# Altium PCB S52多功能板.PcbDoc (part 1 of 5)
Units mm, origin at the board's own origin, x right, y up, seen from the top; angles counter-clockwise.
Board outline 152.4 x 101.6 mm, 2 copper layers (Top Layer, Bottom Layer); 136 components, 143 nets, 561 pads, 46 vias.
Unrouted connection lines stored in the file: 1.
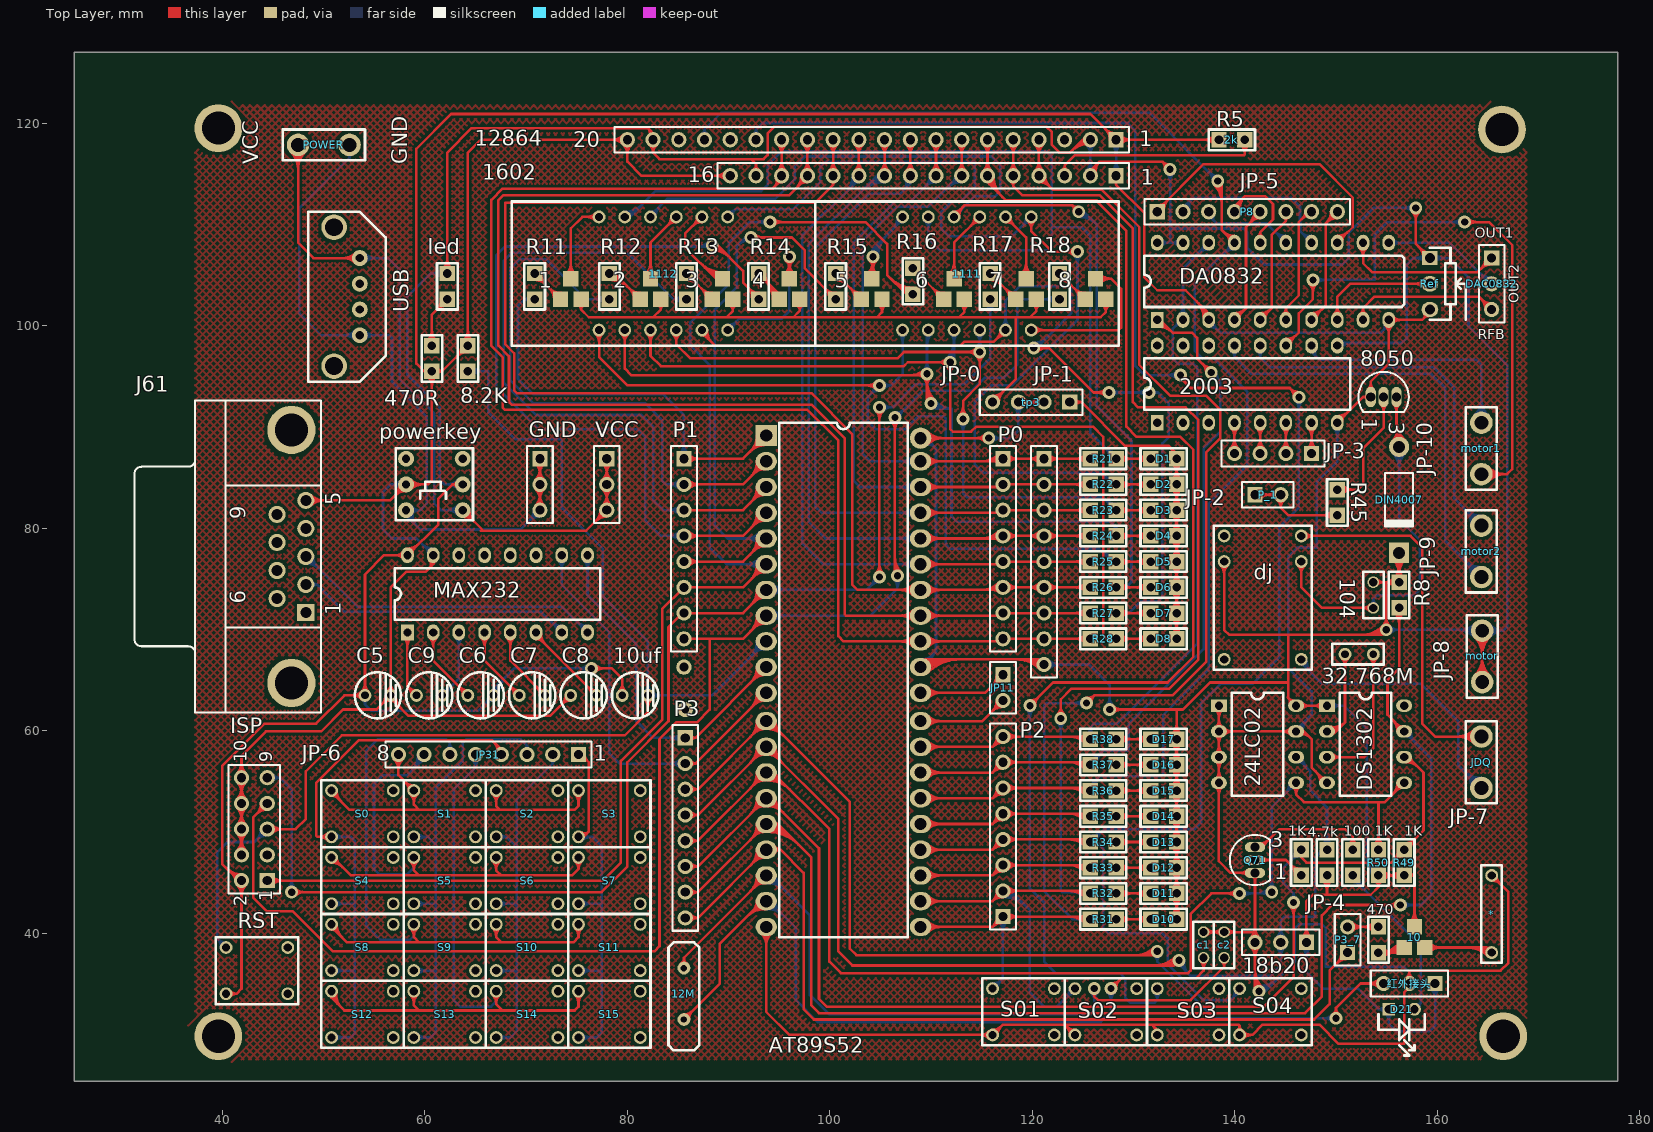
[diagram p0: Top Layer view]
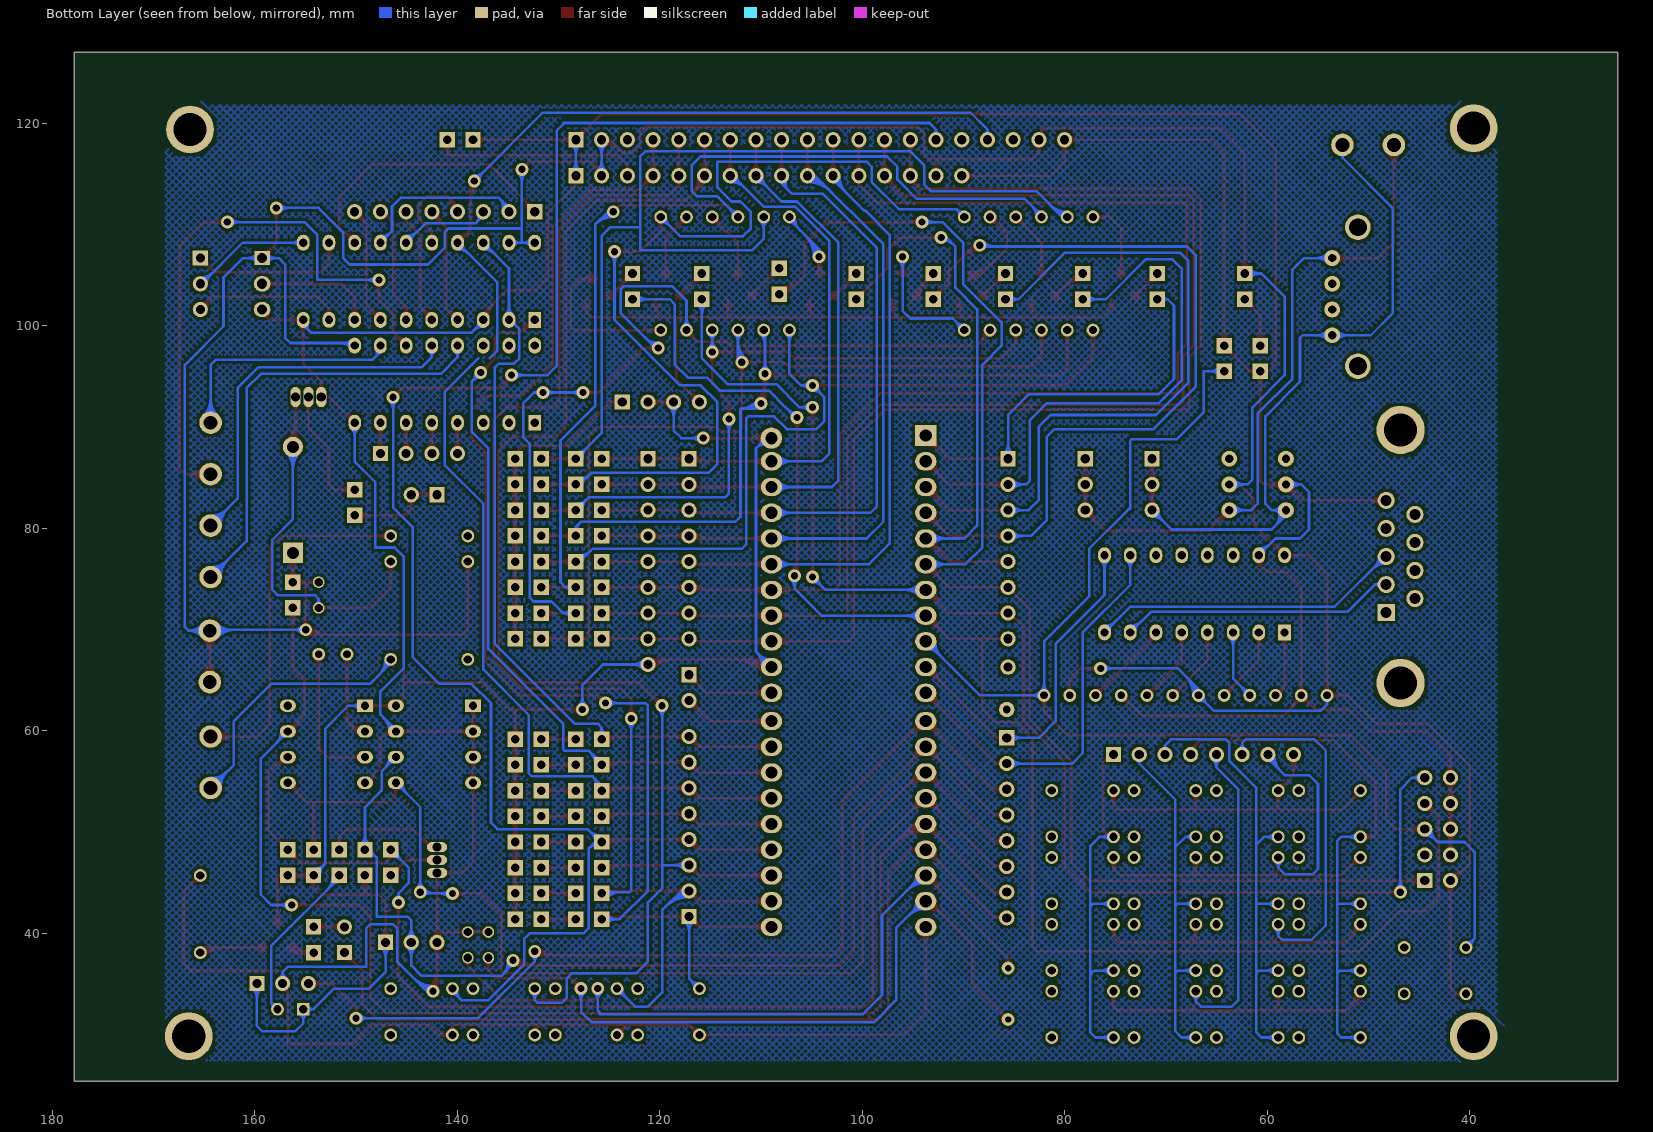
[diagram p1: Bottom Layer view, seen from below]

## Layer stack, top to bottom
Top Layer: signal copper 0.0356
Dielectric: dielectric 0.32, FR-4, Dk 4.8
Bottom Layer: signal copper 0.0356

## Board outline
25.4,25.4 177.8,25.4 177.8,127 25.4,127

## Design rules (kind name [scope] priority, off if disabled: settings)
Clearance [All] p1: gap=0.254
ComponentClearance [All] p1: gap=0.254 collisioncheckmode=0 verticalgap=0.254
PolygonConnect [All] p1: connectstyle=Relief reliefconductorwidth=0.254 reliefentries=4 polygonreliefangle="90 Angle"
RoutingVias [All] p1: holewidth=0.711 width=1.27 viastyle="Through Hole" minholewidth=0.711 minwidth=1.27 maxholewidth=0.711 maxwidth=1.27
SolderMaskExpansion [All] p1: expansion=0.102
TestPointUsage [All] p1: valid=0 allowmultiple=FALSE
Testpoint [All] p1: side=15 testpointundercomponent=TRUE minsize=1.016 maxsize=2.54 preferedsize=1.524 minholesize=0 maxholesize=1.016 preferedholesize=0.813 testpointgrid=0.025 style=1023 order=0-112345678
Width [All] p1: maxlimit=0.254 minlimit=0.254 preferedwidth=0.254
17 further rules are at their usual default settings.

## Components (designator, comment, footprint, x,y, rotation, side; value= is the part's Value field where it differs from the comment)
1 "NPN1" NPN1PF 72.39,105.664 r0 top
1K "RES34" RES1PF 146.558,48.26 r270 top
2 "2" NPN1PF 80.264,105.664 r0 top
2k "R5" RES1PF 138.43,118.364 r0 top
3 "3" NPN1PF 87.376,105.664 r0 top
4 "NPN1" NPN1PF 93.98,105.664 r0 top
4.7k "RES1" RES1PF 149.098,45.72 r90 top
5 "NPN1" NPN1PF 102.108,105.664 r0 top
6 "NPN1" NPN1PF 110.236,105.664 r0 top
7 "NPN1" NPN1PF 117.348,105.664 r0 top
8 "NPN1" NPN1PF 124.206,105.664 r0 top
8.2K "RES1" RES1PF 64.262,95.504 r90 top
10 "NPN1" NPN1PF 155.702,41.656 r0 top
10uf "10uf" cap2 74.93,63.5 r0 top
12M "12M" CRYSTAL 84.582,34.036 r90 top
18b20 "CON3" HDR1X3 147.066,39.116 r180 top
24LC02 "24LC02" DIP8 138.43,62.484 r0 top
32.768M "CY" CYPF 155.702,65.024 r180 top (schematic designator 121)
100 "RES2" RES1PF 151.638,45.72 r90 top
104 "0.01UF" RAD0.3 153.67,75.184 r270 top
470 "R2" RES1PF 154.178,38.1 r90 top
470R "R1" RES1PF 60.706,98.044 r270 top
1111 "LED8" LED8PF 98.552,112.268 r0 top
1112 "LED8" LED8PF 68.58,112.268 r0 top
1602 "Header 16" HDR1X16 128.27,114.808 r180 top (schematic designator JP6)
2003 "2003" 2003PF 130.81,91.44 r90 top
8050 "2N3904" TO-92A 154.686,92.964 r270 top (schematic designator Q7)
12864 "" HDR1X20 128.27,118.364 r180 top (schematic designator JP7)
* "LS1" LS1PF 165.354,38.1 r90 top
AT89S52 "AT89S52" AT89S52PF 92.71,65.532 r0 top
c1 "C" RAD0.3 136.906,40.64 r270 top
c2 "15p" RAD0.3 138.938,40.64 r270 top
C5 "1uf" cap2 49.53,63.5 r0 top
C6 "1uf" cap2 59.69,63.5 r0 top
C7 "1uf" cap2 64.77,63.5 r0 top
C8 "1uf" cap2 69.85,63.5 r0 top
C9 "1uf" cap2 54.61,63.5 r0 top
D1 "LED" RES1PF 134.239,86.868 r180 top
D2 "LED" RES1PF 134.239,84.328 r180 top
D3 "LED" RES1PF 134.239,81.788 r180 top
D4 "LED" RES1PF 134.239,79.248 r180 top
D5 "LED" RES1PF 134.239,76.708 r180 top
D6 "LED" RES1PF 134.239,74.168 r180 top
D7 "LED" RES1PF 134.239,71.628 r180 top
D8 "LED" RES1PF 134.239,69.088 r180 top
D10 "LED" RES1PF 134.239,41.402 r180 top
D11 "LED" RES1PF 134.239,43.942 r180 top
D12 "LED" RES1PF 134.239,46.482 r180 top
D13 "LED" RES1PF 134.239,49.022 r180 top
D14 "LED" RES1PF 134.239,51.562 r180 top
D15 "LED" RES1PF 134.239,54.102 r180 top
D16 "LED" RES1PF 134.239,56.642 r180 top
D17 "LED" RES1PF 134.239,59.182 r180 top
D21 "LED" LED 157.226,32.004 r180 top
DA0832 "DA0832" DAC0832PF 130.81,101.6 r90 top
DAC0832 "CON3" HDR1X3 165.354,106.68 r270 top
DIN4007 "Diode 1N4007" DO-41 156.21,82.804 r270 top
dj "JDQ" JDQPF 138.938,79.248 r0 top
DS1302 "DS1302" DIP8 149.098,62.484 r0 top
GND "公共电源" HDR1X3 71.374,86.868 r270 top
ISP "download" HDR2X5 44.45,45.212 r90 top
J61 "D Connector 9" DSUB1.385-2H9 37.338,77.216 r90 top
JDQ "POWER" POWERPF 164.338,59.436 r270 top
JP11 "Header 2" HDR1X2 117.094,65.532 r270 top
JP31 "Header 8" HDR1X8 75.184,57.658 r180 top
JP-0 "Header 9" HDR1X9 121.158,86.868 r270 top (schematic designator JP0)
JP-3 "Header 4" HDR1X4 147.574,87.376 r180 top (schematic designator JP4)
led "LED" RES1PF 62.23,105.156 r270 top (schematic designator D9)
MAX232 "MAX232" DIP16 58.293,69.723 r90 top
motor "POWER" POWERPF 164.416,64.81 r90 top
motor1 "POWER" POWERPF 164.338,85.344 r90 top
motor2 "POWER" POWERPF 164.338,75.184 r90 top (schematic designator motor3)
P0 "Header 8" HDR1X8 117.094,86.868 r270 top
P1 "Header 8" HDR1X8 85.598,86.868 r270 top locked
P2 "Header 8" HDR1X8 117.094,41.656 r90 top
P3 "Header 8" HDR1X8 85.725,59.309 r270 top
P3_7 "Header 2" HDR1X2 151.13,38.1 r90 top (schematic designator P_0)
P8 "Header 8" HDR1X8 132.334,111.252 r0 top
P_1 "Header 2" HDR1X2 141.986,83.312 r0 top
POWER "POWER" POWERPF 47.498,117.856 r0 top
powerkey "POWERKEY" POWERKEY1 63.754,81.788 r180 top
Q71 "2N3904" TO-92A 141.986,47.244 r0 top
R8 "1K" RES1PF 156.21,72.136 r90 top
R11 "RES1" RES1PF 70.866,102.616 r90 top
R12 "RES1" RES1PF 78.232,102.616 r90 top
R13 "RES1" RES1PF 85.852,102.616 r90 top
R14 "RES1" RES1PF 92.964,102.616 r90 top
R15 "RES1" RES1PF 100.584,102.616 r90 top
R16 "RES1" RES1PF 108.204,103.124 r90 top
R17 "RES1" RES1PF 115.824,102.616 r90 top
R18 "RES1" RES1PF 122.682,102.616 r90 top
R21 "RES1" RES1PF 125.73,86.868 r0 top
R22 "RES1" RES1PF 125.73,84.328 r0 top
R23 "RES1" RES1PF 125.73,81.788 r0 top
R24 "RES1" RES1PF 125.73,79.248 r0 top
R25 "RES1" RES1PF 125.73,76.708 r0 top
R26 "RES1" RES1PF 125.73,74.168 r0 top
R27 "RES1" RES1PF 125.73,71.628 r0 top
R28 "RES1" RES1PF 125.73,69.088 r0 top
R31 "RES1" RES1PF 125.73,41.402 r0 top
R32 "RES1" RES1PF 125.73,43.942 r0 top
R33 "RES1" RES1PF 125.73,46.482 r0 top
R34 "RES1" RES1PF 125.73,49.022 r0 top
R35 "RES1" RES1PF 125.73,51.562 r0 top
R36 "RES1" RES1PF 125.73,54.102 r0 top
R37 "RES1" RES1PF 125.73,56.642 r0 top
R38 "RES1" RES1PF 125.73,59.182 r0 top
R45 "1K" RES1PF 150.114,83.82 r270 top
R49 "1K" RES1PF 156.718,48.26 r270 top
R50 "1K" RES1PF 154.178,48.26 r270 top
Ref "25k" SIP3-D 159.258,106.68 r270 top
RST "KEY" keypf 40.386,38.608 r0 top (schematic designator reset)
S0 "KEY" KEYPF 50.8,54.102 r0 top
S1 "KEY" KEYPF 58.928,54.102 r0 top
S01 "KEY" KEYPF 116.078,34.544 r0 top
S02 "KEY" KEYPF 124.206,34.544 r0 top
S2 "KEY" KEYPF 67.056,54.102 r0 top
S3 "KEY" KEYPF 75.184,54.102 r0 top
S03 "KEY" KEYPF 132.334,34.544 r0 top
S4 "KEY" KEYPF 50.8,47.498 r0 top
S04 "KEY" KEYPF 140.462,34.544 r0 top
S5 "KEY" KEYPF 58.928,47.498 r0 top
S6 "KEY" KEYPF 67.056,47.498 r0 top
S7 "KEY" KEYPF 75.184,47.498 r0 top
S8 "KEY" KEYPF 50.8,40.894 r0 top
S9 "KEY" KEYPF 58.928,40.894 r0 top
S10 "KEY" KEYPF 67.056,40.894 r0 top
S11 "KEY" KEYPF 75.184,40.894 r0 top
S12 "KEY" KEYPF 50.8,34.29 r0 top
S13 "KEY" KEYPF 58.928,34.29 r0 top
S14 "KEY" KEYPF 67.056,34.29 r0 top
S15 "KEY" KEYPF 75.184,34.29 r0 top
tp3 "Header 4" HDR1X4 123.698,92.456 r180 top
USB "USBPOWER" USBPOWER1 53.594,99.06 r90 top (schematic designator 211)
VCC "" HDR1X3 77.978,86.868 r270 top
红外接头 "Header 3" HDR1X3 159.766,35.052 r180 top

## Footprints (in the part's own frame and the unit in brackets; to place one, negate y for a bottom-side part, rotate by r counter-clockwise, add the part's x,y. Pads: shape width x height; smd on the part's side, far side on the other; paste and mask are expansions set on the pad)
2003PF [mm] "2003"
  rect 1.575x1.25 hole 0.813: 1(-1.02,-1.525)
  oval 1.575x1.25 hole 0.813: 2(-1.02,-4.065) 3(-1.02,-6.605) 4(-1.02,-9.145) 5(-1.02,-11.685) 6(-1.02,-14.225) 7(-1.02,-16.765) 8(-1.02,-19.305) 9(6.6,-19.305) 10(6.6,-16.765) 11(6.6,-14.225) 12(6.6,-11.685) 13(6.6,-9.145) 14(6.6,-6.605) 15(6.6,-4.065) 16(6.6,-1.525)
  silkscreen extent 0.25,-20.58 5.33,-0.25
AT89S52PF [mil]
  rect 82.87x82.87 hole 47.75: 1(39.85,929.96)
  oval 82.87x71.06 hole 47.75: 2(39.85,829.96) 3(39.85,729.96) 4(39.85,629.96) 5(39.85,529.96) 6(39.85,429.96) 7(39.85,329.96) 8(39.85,229.96) 9(39.85,129.96) 10(39.85,29.96) 11(39.85,-70.04) 12(40,-180) 13(40,-280) 14(40,-380) 15(40,-480) 16(40,-580) 17(40,-680) 18(40,-780) 19(40,-880) 20(40,-980) 21(640,-980) 22(640,-880) 23(640,-780) 24(640,-680) 25(640,-580) 26(640,-480) 27(640,-380) 28(640,-280) 29(640,-180) 30(639.85,-70.04) 31(639.85,29.96) 32(639.85,129.96) 33(639.85,229.96) 34(639.85,329.96) 35(639.85,429.96) 36(639.85,529.96) 37(639.85,629.96) 38(639.85,729.96) 39(639.85,829.96)
  round 82.87 hole 47.75: 40(640,920)
  silkscreen extent 90,-1020 590,980
cap2 [mil]
  round 50 hole 30: 1(180,0) 2(280,0)
  silkscreen extent 140,-90 320,90
CRYSTAL [mil]
  round 50 hole 25: 1(-100,-40) 2(100,-40)
  silkscreen extent -220,-100 200,20
CYPF [mil] "CY"
  round 50 hole 30: 1(80,-100) 2(190,-100)
  silkscreen extent 40,-140 240,-60
DAC0832PF [mil] "DAC0832"
  rect 62x49.21 hole 32: 1(-40.15,-60.04)
  oval 62x49.21 hole 32: 2(-40.15,-160.04) 3(-40.15,-260.04) 4(-40.15,-360.04) 5(-40.15,-460.04) 6(-40.15,-560.04) 7(-40.15,-660.04) 8(-40.15,-760.04) 9(-40,-860) 10(-40.15,-960.04) 11(259.85,-960.04) 12(259.85,-860.04) 13(259.85,-760.04) 14(259.85,-660.04) 15(259.85,-560.04) 16(259.85,-460.04) 17(259.85,-360.04) 18(259.85,-260.04) 19(259.85,-160.04) 20(259.85,-60.04)
  silkscreen extent 10,-1020 210,-10
DIP8 [mil]
  rect 62x48 hole 32: 1(-0.15,-0.04)
  oval 62x48 hole 32: 2(-0.15,-100.04) 3(-0.15,-200.04) 4(-0.15,-300.04) 5(299.85,-300.04) 6(299.85,-200.04) 7(299.85,-100.04) 8(299.85,-0.04)
  silkscreen extent 50,-350 250,50
DIP16 [mil]
  rect 62x49.21 hole 32: 1(-0.15,-0.04)
  oval 62x49.21 hole 32: 2(-0.15,-100.04) 3(-0.15,-200.04) 4(-0.15,-300.04) 5(-0.15,-400.04) 6(-0.15,-500.04) 7(-0.15,-600.04) 8(-0.15,-700.04) 9(299.85,-700.04) 10(299.85,-600.04) 11(299.85,-500.04) 12(299.85,-400.04) 13(299.85,-300.04) 14(299.85,-200.04) 15(299.85,-100.04) 16(299.85,-0.04)
  silkscreen extent 50,-750 250,50
DO-41 [mm] "Diode, Axial; Body 5.2 x 2.7 mm (LxDia. max), Lead Dia. 0.86 mm (max)"
  round 2 hole 1.2: 1(-5.23,0)
  rect 2x2 hole 1.2: 2(5.23,0)
  silkscreen extent -2.65,-1.4 2.74,1.4
DSUB1.385-2H9 [mm] "Connector; D Subminiature; 9 Position; Right Angle; Pitch 1.385 mm"
  rect 1.69x1.69 hole 1.09: 1(-5.54,-10.92)
  round 1.69 hole 1.09: 2(-2.77,-10.92) 3(0,-10.92) 4(2.77,-10.92) 5(5.54,-10.92) 6(-4.155,-8.08) 7(-1.385,-8.08) 8(1.385,-8.08) 9(4.155,-8.08)
  round 4.76 hole 3.26: 10(-12.495,-9.5) 11(12.495,-9.5)
  silkscreen extent -15.4,-12.4 15.4,6
HDR1X2 [mm] "Connector; Header; 2 Position"
  rect 1.5x1.5 hole 0.9: 1(0,0)
  round 1.5 hole 0.9: 2(2.54,0)
  silkscreen extent -1.27,-1.27 3.81,1.27
HDR1X3 [mm] "Connector; Header; 3 Position"
  rect 1.5x1.5 hole 0.9: 1(0,0)
  round 1.5 hole 0.9: 2(2.54,0) 3(5.08,0)
  silkscreen extent -1.27,-1.27 6.35,1.27
HDR1X4 [mm] "Connector; Header; 4 Position"
  rect 1.5x1.5 hole 0.9: 1(0,0)
  round 1.5 hole 0.9: 2(2.54,0) 3(5.08,0) 4(7.62,0)
  silkscreen extent -1.27,-1.27 8.89,1.27
HDR1X8 [mm] "Connector; Header; 8 Position"
  rect 1.5x1.5 hole 0.9: 1(0,0)
  round 1.5 hole 0.9: 2(2.54,0) 3(5.08,0) 4(7.62,0) 5(10.16,0) 6(12.7,0) 7(15.24,0) 8(17.78,0)
  silkscreen extent -1.27,-1.27 19.05,1.27
HDR1X9 [mm] "Connector; Header; 9 Position"
  rect 1.5x1.5 hole 0.9: 1(0,0)
  round 1.5 hole 0.9: 2(2.54,0) 3(5.08,0) 4(7.62,0) 5(10.16,0) 6(12.7,0) 7(15.24,0) 8(17.78,0) 9(20.32,0)
  silkscreen extent -1.27,-1.27 21.59,1.27
HDR1X16 [mm] "Connector; Header; 16 Position"
  rect 1.5x1.5 hole 0.9: 1(0,0)
  round 1.5 hole 0.9: 2(2.54,0) 3(5.08,0) 4(7.62,0) 5(10.16,0) 6(12.7,0) 7(15.24,0) 8(17.78,0) 9(20.32,0) 10(22.86,0) 11(25.4,0) 12(27.94,0) 13(30.48,0) 14(33.02,0) 15(35.56,0) 16(38.1,0)
  silkscreen extent -1.27,-1.27 39.37,1.27
HDR1X20 [mm] "Connector; Header; 20 Position"
  rect 1.5x1.5 hole 0.9: 1(0,0)
  round 1.5 hole 0.9: 2(2.54,0) 3(5.08,0) 4(7.62,0) 5(10.16,0) 6(12.7,0) 7(15.24,0) 8(17.78,0) 9(20.32,0) 10(22.86,0) 11(25.4,0) 12(27.94,0) 13(30.48,0) 14(33.02,0) 15(35.56,0) 16(38.1,0) 17(40.64,0) 18(43.18,0) 19(45.72,0) 20(48.26,0)
  silkscreen extent -1.27,-1.27 49.53,1.27
HDR2X5 [mm] "Connector; Header; 5x2 Position"
  rect 1.5x1.5 hole 0.9: 1(0,0)
  round 1.5 hole 0.9: 2(0,2.54) 3(2.54,0) 4(2.54,2.54) 5(5.08,0) 6(5.08,2.54) 7(7.62,0) 8(7.62,2.54) 9(10.16,0) 10(10.16,2.54)
  silkscreen extent -1.27,-1.27 11.43,3.81
JDQPF [mil] "JDQ"
  round 50 hole 32: 1(0,0) 2(300,0) 3(0,-480) 4(300,-480) 5(0,-100) 6(300,-100)
  silkscreen extent -40,-520 340,40
keypf [mil] "KEY"
  round 50 hole 32: 1(0,0) 2(0,-180) ""(240,-180) ""(240,0)
  silkscreen extent -40,-220 280,40
KEYPF [mil] "KEY"
  round 50 hole 32: 1(0,0) 2(0,-180) ""(240,-180) ""(240,0)
  silkscreen extent -40,-220 280,40
LED [mil]
  rect 50x50 hole 32: 1(80,-20)
  round 50 hole 32: 2(-20,-20)
  silkscreen extent -60,0 120,160
LED8PF [mil] "LED8"
  round 50 hole 32: 1(340,-500) 2(440,-500) 3(540,-500) 4(640,-500) 5(740,-500) 6(840,-500) 7(840,-60) 8(740,-60) 9(640,-60) 10(540,-60) 11(440,-60) 12(340,-60)
  silkscreen extent 0,-560 1180,0
LS1PF [mil] "LS1"
  round 50 hole 32: 1(0,0) 2(300,0)
  silkscreen extent -40,-40 340,40
NPN1PF [mil] "NPN1"
  rect 60x60 smd: B(40,-120) C(80,-40) E(120,-120)
POWERKEY1 [mil] "POWERKEY"
  round 62 hole 32: 1(0,0) 2(0,-100) 3(0,-200) 4(220,-200) 5(220,-100) 6(220,0)
  silkscreen extent -40,-240 260,40
POWERPF [mm] "POWER"
  round 2.224 hole 1.362: 1(0,0) 2(5.08,0)
  silkscreen extent -1.52,-1.52 6.6,1.52
RAD0.3 [mil]
  round 45 hole 32: 1(20,0) 2(120,0)
  silkscreen extent -20,-40 160,40
RES1PF [mil] "RES1"
  rect 60x60 hole 33.19: 1(0,0) 2(100,0)
  silkscreen extent -40,-40 140,40
SIP3-D [mil]
  rect 55x60 hole 40: 1(0,0)
  oval 60x65 hole 40: 2(200,0) 3(100,0)
  silkscreen extent -40,0 240,140
TO-92A [mm] "TO, Flat Index; 3 In-Line, Axial Leads; Body Dia. 4.5mm; Leads 0.51 x 0.48 mm (max)"
  oval 2x1 hole 0.9: 1(0,-1.27) 2(0,0) 3(0,1.27)
  silkscreen extent -2.48,-2.48 1.5,2.48
USBPOWER1 [mil] "USBPOWER"
  round 62 hole 32: 1(0,0) 2(100,0) 3(200,0) 4(300,0)
  round 99.37 hole 69.37: ""(-120,100) ""(420,100)
  silkscreen extent -180,-100 480,200

## Part data
1K 2k 100 470 470R R8 R45 R49 R50: library part RES1
2 3: library part NPN1
10uf C5 C6 C7 C8 C9: library part "CAPACITOR POL", "Capacitor"
12M: library part CRYSTAL, "Crystal"
18b20 GND VCC: library part "Header 3", "Header, 3-Pin"
104 c1 c2: library part CAP, "Capacitor"
1602: "Header, 16-Pin"
8050 Q71: "NPN General Purpose Amplifier"
12864: library part "Header 20", "Header, 20-Pin"
AT89S52: library part 8051
DAC0832: "Connector"
DIN4007: "1 Amp General Purpose Rectifier"
ISP: library part "Header 5X2", "Header, 5-Pin, Dual row"
J61: "Receptacle Assembly, 9 Position, Right Angle"
JP11 P3_7 P_1: "Header, 2-Pin"
JP31 P0 P1 P2 P3 P8: "Header, 8-Pin"
JP-0: "Header, 9-Pin"
JP-3 tp3: "Header, 4-Pin"
Ref: library part POT2, "Potentiometer"
红外接头: "Header, 3-Pin"

## Free pads (board coordinates)
  round 1.524 hole 0.9: 0(85.598,66.294)
  round 1.524 hole 0.762: 1(85.725,62.103)
  round 4.72 hole 3.267: 2(39.624,29.845) 2(39.624,119.507) 2(166.37,119.38) 2(166.497,29.845)

## Via types
v1: diameter 1.27, hole 0.711, Top Layer to Bottom Layer, 46 vias

## Nets (pads, with @x,y where several pads share a name; then routed paths per layer and width w, separated by ;. In a path a pad name is that pad's centre, name@x,y a point inside that pad or via, vN(x,y) a via of type N, cw(c..) or ccw(c..) an arc to the next point about the centre after c; other vN are vias at no path point)
DISPLAY: 1.E 2.E 3.E 4.E 5.E 6.E 7.E 8.E tp3.4 | length 91.8
  Top Layer w0.254: 1.E@75.16,102.045 cw(c74.943,101.6) 75.438,101.6 ; 1.E@75.438,102.616 75.438,101.6 ; 1.E@75.716,102.045 ccw(c75.933,101.6) 75.438,101.6 ; 82.55,100.838 83.312,101.6 ; 2.E@83.034,102.045 cw(c82.817,101.6) 83.312,101.6 ; 2.E@83.312,102.616 83.312,101.6 ; 2.E@83.59,102.045 ccw(c83.807,101.6) 83.312,101.6 ; 89.789,100.838 90.424,101.473 ; 3.E@90.089,102.077 cw(c89.713,101.473) 90.424,101.473 ; 3.E@90.424,102.616 90.424,101.473 ; 3.E@90.759,102.077 ccw(c91.135,101.473) 90.424,101.473 ; 96.393,100.838 97.028,101.473 ; 4.E@96.693,102.077 cw(c96.317,101.473) 97.028,101.473 ; 4.E@97.028,102.616 97.028,101.473 ; 4.E@97.363,102.077 ccw(c97.739,101.473) 97.028,101.473 ; 104.648,100.838 105.156,101.346 ; 5.E@104.775,102.108 cw(c104.204,101.346) 105.156,101.346 ; 5.E@105.156,102.616 105.156,101.346 ; 5.E@105.537,102.108 ccw(c106.108,101.346) 105.156,101.346 ; 112.776,100.838 113.284,101.346 ; 6.E@112.903,102.108 cw(c112.332,101.346) 113.284,101.346 ; 6.E@113.284,102.616 113.284,101.346 ; 6.E@113.665,102.108 ccw(c114.236,101.346) 113.284,101.346 ; tp3.4@116.078,92.456 118.364,94.742 118.364,100.838 ; tp3.4@116.078,92.825 ccw(c116.078,93.716) 116.708,93.086 ccw(c117.338,92.456) tp3.4@116.447,92.456 ; tp3.4@116.078,93.079 ccw(c116.078,94.583) 117.142,93.52 ccw(c118.205,92.456) tp3.4@116.701,92.456 ; 119.761,100.838 120.396,101.473 ; 7.E@120.061,102.077 cw(c119.685,101.473) 120.396,101.473 ; 7.E@120.396,102.616 120.396,101.473 ; 7.E@120.731,102.077 ccw(c121.107,101.473) 120.396,101.473 ; 8.E@126.873,102.108 cw(c126.302,101.346) 127.254,101.346 ; 8.E@127.254,102.616 127.254,101.346 ; 8.E@127.635,102.108 ccw(c128.206,101.346) 127.254,101.346 ; 75.438,101.6 76.2,100.838 126.746,100.838 127.254,101.346
GND: 2k.1 8.2K.2 18b20.3 24LC02.1 24LC02.2 24LC02.3 24LC02.4 24LC02.7 470R.2 1602.1 1602.16 2003.8 8050.1 12864.1 12864.20 *.2 AT89S52.20 c1.1 c2.1 C5.2 C8.1 DA0832.3 DA0832.10 DS1302.4 ISP.4 ISP.6 ISP.8 ISP.10 J61.5 MAX232.15 powerkey.5 Q71.1 Ref.2 S01.2 S02.2 S03.2 S04.2 红外接头.2 | length 724.4
  Top Layer w0.254: ISP.4@41.469,48.193 ccw(c40.406,49.256) 41.91,49.256 ccw(c43.414,49.256) ISP.4@42.351,48.193 ; ISP.6@41.469,49.851 cw(c40.406,48.788) 41.91,48.788 cw(c43.414,48.788) ISP.6@42.351,49.851 ; ISP.6@41.469,50.733 ccw(c40.406,51.796) 41.91,51.796 ccw(c43.414,51.796) ISP.6@42.351,50.733 ; ISP.8@41.469,52.391 cw(c40.406,51.328) 41.91,51.328 cw(c43.414,51.328) ISP.8@42.351,52.391 ; ISP.8@41.469,53.273 ccw(c40.406,54.336) 41.91,54.336 ccw(c43.414,54.336) ISP.8@42.351,53.273 ; ISP.10@41.469,54.931 cw(c40.406,53.868) 41.91,53.868 cw(c43.414,53.868) ISP.10@42.351,54.931 ; ISP.10@41.469,55.813 ccw(c40.406,56.876) 41.91,56.876 ccw(c43.414,56.876) ISP.10@42.351,55.813 ; ISP.4@41.649,48.013 ccw(c41.019,48.643) 41.91,48.643 ccw(c42.801,48.643) ISP.4@42.171,48.013 ; ISP.6@41.649,50.031 cw(c41.019,49.401) 41.91,49.401 cw(c42.801,49.401) ISP.6@42.171,50.031 ; ISP.6@41.649,50.553 ccw(c41.019,51.183) 41.91,51.183 ccw(c42.801,51.183) ISP.6@42.171,50.553 ; ISP.8@41.649,52.571 cw(c41.019,51.941) 41.91,51.941 cw(c42.801,51.941) ISP.8@42.171,52.571 ; ISP.8@41.649,53.093 ccw(c41.019,53.723) 41.91,53.723 ccw(c42.801,53.723) ISP.8@42.171,53.093 ; ISP.10@41.649,55.111 cw(c41.019,54.481) 41.91,54.481 cw(c42.801,54.481) ISP.10@42.171,55.111 ; ISP.10@41.649,55.633 ccw(c41.019,56.263) 41.91,56.263 ccw(c42.801,56.263) ISP.10@42.171,55.633 ; ISP.4@41.91,47.752 41.91,57.531 44.323,59.944 49.784,59.944 51.943,62.103 55.245,62.103 C5.2@56.642,63.5 ; J61.5@48.258,82.756 56.594,82.756 powerkey.5@58.166,84.328 60.325,84.328 60.706,84.709 470R.2@60.706,95.504 ; J61.5@48.586,82.428 cw(c49.378,81.636) 49.378,82.756 cw(c49.378,83.876) J61.5@48.586,83.084 ; J61.5@48.766,82.248 cw(c49.991,81.023) 49.991,82.756 cw(c49.991,84.489) J61.5@48.766,83.264 ; C5.2@56.134,63.5 cw(c54.908,63.5) 55.775,62.633 cw(c56.642,61.766) 56.642,62.992 cw(c56.642,62.379) 57.076,62.812 ; C5.2@56.283,63.859 ccw(c55.416,64.726) 56.642,64.726 ccw(c57.868,64.726) C5.2@57.001,63.859 ; C5.2@56.896,63.5 ccw(c58.122,63.5) 57.255,62.633 ; C5.2@57.15,63.5 ccw(c58.99,63.5) 57.689,62.199 ; powerkey.5@57.506,84.328 cw(c55.911,84.328) 57.039,83.201 cw(c58.166,82.073) powerkey.5@58.166,83.668 ; powerkey.5@57.76,84.328 cw(c56.778,84.328) 57.472,83.634 cw(c58.166,82.94) powerkey.5@58.166,83.922 ; powerkey.5@58.453,84.041 cw(c59.147,83.347) 59.147,84.328 cw(c59.147,85.309) powerkey.5@58.453,84.615 ; powerkey.5@58.633,83.861 cw(c59.76,82.734) 59.76,84.328 cw(c59.76,85.922) powerkey.5@58.633,84.795 ; 470R.2@60.257,95.055 cw(c59.173,93.971) 60.706,93.971 cw(c62.239,93.971) 470R.2@61.155,95.055 ; 60.432,76.053 ccw(c60.019,76.466) MAX232.15@60.459,76.849 ; 470R.2@60.437,95.235 cw(c59.786,94.584) 60.706,94.584 cw(c61.626,94.584) 470R.2@60.975,95.235 ; 60.624,76.245 ccw(c60.225,76.645) MAX232.15@60.65,77.016 ; MAX232.15@60.657,76.711 cw(c60.56,76.455) 60.834,76.455 ; 60.816,76.437 ccw(c60.43,76.824) MAX232.15@60.842,77.183 ; MAX232.15@60.834,77.339 60.834,76.455 ; MAX232.15@61.011,76.711 ccw(c61.108,76.455) 60.834,76.455 ; 470R.2@61.277,95.226 cw(c61.722,95.009) 61.722,95.504 ; 470R.2@61.277,95.782 ccw(c61.722,95.999) 61.722,95.504 ; 8.2K.2@63.627,98.044 cw(c62.094,98.044) 63.178,96.96 cw(c64.262,95.876) 8.2K.2@64.262,97.409 ; 8.2K.2@63.813,98.493 ccw(c62.729,99.577) 64.262,99.577 ccw(c65.795,99.577) 8.2K.2@64.711,98.493 ; 8.2K.2@63.881,98.044 cw(c62.961,98.044) 63.612,97.394 cw(c64.262,96.743) 8.2K.2@64.262,97.663 ; 8.2K.2@63.993,98.313 ccw(c63.342,98.964) 64.262,98.964 ccw(c65.182,98.964) 8.2K.2@64.531,98.313 ; C8.1@73.914,63.5 cw(c72.688,63.5) 73.555,62.633 cw(c74.422,61.766) C8.1@74.422,62.992 ; C8.1@74.422,63.5 72.39,61.468 58.42,61.468 56.642,63.246 56.642,74.168 58.166,75.692 60.071,75.692 60.834,76.455 ; 12864.20@79.569,118.805 cw(c78.506,119.868) 78.506,118.364 cw(c78.506,116.86) 79.569,117.923 cw(c78.506,116.86) 80.01,116.86 cw(c81.514,116.86) 12864.20@80.451,117.923 ; 12864.20@79.749,118.625 cw(c79.119,119.255) 79.119,118.364 cw(c79.119,117.473) 79.749,118.103 cw(c79.119,117.473) 80.01,117.473 cw(c80.901,117.473) 12864.20@80.271,118.103 ; 1602.16@89.729,114.367 ccw(c88.666,113.304) 88.666,114.808 ccw(c88.666,116.312) 1602.16@89.729,115.249 ; 1602.16@89.909,114.547 ccw(c89.279,113.917) 89.279,114.808 ccw(c89.279,115.699) 1602.16@89.909,115.069 ; 1602.16@90.17,114.808 81.407,114.808 80.01,116.205 12864.20@80.01,118.364 65.532,118.364 64.262,117.094 8.2K.2@64.262,98.044 61.722,95.504 ; AT89S52.20@93.178,40.092 cw(c91.854,38.768) 93.726,38.768 cw(c95.598,38.768) AT89S52.20@94.274,40.092 ; AT89S52.20@93.357,40.271 cw(c92.467,39.381) 93.726,39.381 cw(c94.985,39.381) AT89S52.20@94.095,40.271 ; AT89S52.20@93.726,40.64 93.726,32.258 96.012,29.972 S01.2@116.078,29.972 117.094,30.988 140.335,30.988 140.462,30.861 ; S01.2@115.719,29.613 ccw(c114.852,28.746) 114.852,29.972 ccw(c114.852,31.198) S01.2@115.719,30.331 ; S01.2@116.078,30.48 ccw(c116.078,31.706) 116.945,30.839 ccw(c117.812,29.972) S01.2@116.586,29.972 ; 123.19,30.988 S02.2@124.206,29.972 ; S02.2@123.698,29.972 ccw(c122.472,29.972) 123.339,30.839 ccw(c124.206,31.706) S02.2@124.206,30.48 ; 12864.1@127.647,118.364 ccw(c126.143,118.364) 127.206,119.428 ccw(c128.27,120.491) 12864.1@128.27,118.987 ; 12864.1@127.901,118.364 ccw(c127.01,118.364) 127.64,118.994 ccw(c128.27,119.624) 12864.1@128.27,118.733 ; 1602.1@128.057,114.222 cw(c127.947,113.919) 128.27,113.919 ; 1602.1@128.27,114.808 128.27,113.919 ; 1602.1@128.483,114.222 ccw(c128.593,113.919) 128.27,113.919 ; 12864.1@128.531,118.103 cw(c129.161,117.473) 129.161,118.364 cw(c129.161,119.255) 12864.1@128.531,118.625 ; 12864.1@128.711,117.923 cw(c129.774,116.86) 129.774,118.364 cw(c129.774,119.868) 12864.1@128.711,118.805 ; 131.826,30.988 132.334,30.48 S03.2@132.334,29.972 ccw(c131.692,30.171) 132.167,30.647 ; 131.87,30.944 cw(c131.237,30.312) S03.2@132.091,30.047 ; 136.229,102.404 cw(c134.567,100.743) DA0832.3@136.917,100.743 ; 136.662,101.971 cw(c135.434,100.743) DA0832.3@137.171,100.743 ; c1.1@136.906,40.132 141.732,40.132 141.986,39.878 ; 137.096,101.537 cw(c136.301,100.743) DA0832.3@137.425,100.743 ; c1.1@137.22,39.818 cw(c137.979,39.059) 137.979,40.132 cw(c137.979,41.205) c1.1@137.22,40.446 ; DA0832.3@137.415,100.58 137.415,101.218 135.128,103.505 132.334,103.505 131.064,104.775 131.064,111.125 128.27,113.919 ; 2k.1@137.981,117.915 ccw(c136.897,116.831) 136.897,118.364 ccw(c136.897,119.897) 2k.1@137.981,118.813 ; 24LC02.4@138.085,54.522 cw(c137.261,53.698) 138.426,53.698 cw(c139.591,53.698) 24LC02.4@138.767,54.522 ; 24LC02.4@138.085,55.204 ccw(c137.261,56.028) 138.426,56.028 ccw(c139.591,56.028) 24LC02.4@138.767,55.204 ; 24LC02.3@138.085,57.062 cw(c137.261,56.238) 138.426,56.238 cw(c139.591,56.238) 24LC02.3@138.767,57.062 ; 24LC02.3@138.085,57.744 ccw(c137.261,58.568) 138.426,58.568 ccw(c139.591,58.568) 24LC02.3@138.767,57.744 ; 24LC02.2@138.085,59.602 cw(c137.261,58.778) 138.426,58.778 cw(c139.591,58.778) 24LC02.2@138.767,59.602 ; 24LC02.2@138.085,60.284 ccw(c137.261,61.108) 138.426,61.108 ccw(c139.591,61.108) 24LC02.2@138.767,60.284 ; 24LC02.1@138.085,62.142 cw(c137.261,61.318) 138.426,61.318 cw(c139.591,61.318) 24LC02.1@138.767,62.142 ; 2k.1@138.161,118.095 ccw(c137.51,117.444) 137.51,118.364 ccw(c137.51,119.284) 2k.1@138.161,118.633 ; 24LC02.2@138.426,59.943 146.813,59.943 147.574,59.182 147.574,56.383 DS1302.4@149.094,54.863 ; 24LC02.1@138.426,62.483 138.426,47.121 139.573,45.974 Q71.1@141.986,45.974 141.986,34.671 v1(142.367,34.29) cw(c143.287,35.21) 141.986,35.21 ; 2k.1@138.43,118.364 12864.1@128.27,118.364 125.73,120.904 62.611,120.904 59.182,117.475 59.182,96.266 59.944,95.504 61.722,95.504 ; c2.1@138.624,39.818 ccw(c137.865,39.059) 137.865,40.132 ccw(c137.865,41.205) c2.1@138.624,40.446 ; 24LC02.2@138.945,59.602 cw(c139.769,58.778) 139.769,59.943 cw(c139.769,61.108) 24LC02.2@138.945,60.284 ; c2.1@139.252,39.818 cw(c140.011,39.059) 140.011,40.132 cw(c140.011,41.205) c2.1@139.252,40.446 ; S04.2@140.204,30.41 ccw(c139.938,30.861) 140.462,30.861 ; S04.2@140.72,30.41 cw(c140.986,30.861) 140.462,30.861 ; S04.2@140.821,29.613 cw(c141.688,28.746) 141.688,29.972 cw(c141.688,31.198) S04.2@140.821,30.331 ; Q71.1@141.222,45.71 ccw(c140.585,45.074) 140.585,45.974 ccw(c140.585,46.874) Q71.1@141.222,46.238 ; 18b20.3@141.545,38.675 cw(c140.482,37.612) 141.986,37.612 cw(c143.49,37.612) 18b20.3@142.427,38.675 ; 18b20.3@141.545,39.557 ccw(c140.482,40.62) 141.986,40.62 ccw(c143.49,40.62) 18b20.3@142.427,39.557 ; Q71.1@141.722,45.71 cw(c141.086,45.074) 141.986,45.074 cw(c142.886,45.074) Q71.1@142.25,45.71 ; 18b20.3@141.725,38.855 cw(c141.095,38.225) 141.986,38.225 cw(c142.877,38.225) 18b20.3@142.247,38.855 ; 18b20.3@141.725,39.377 ccw(c141.095,40.007) 141.986,40.007 ccw(c142.877,40.007) 18b20.3@142.247,39.377 ; 141.795,40.069 cw(c141.292,39.565) 18b20.3@141.889,39.178 ; 141.986,35.823 ccw(c143.9,35.823) v1@142.547,34.47 ; 141.986,36.436 ccw(c144.513,36.436) v1@142.726,34.649 ; 24LC02.7@145.527,59.602 ccw(c144.703,58.778) 144.703,59.943 ccw(c144.703,61.108) 24LC02.7@145.527,60.284 ; 24LC02.7@146.222,59.968 cw(c146.326,58.871) 147.106,59.65 ; 24LC02.7@146.246,59.715 cw(c146.392,58.174) 147.487,59.269 ; 147.967,55.99 cw(c146.839,54.863) DS1302.4@148.434,54.863 ; 148.396,55.561 ccw(c148.916,56.081) DS1302.4@148.916,55.346 ; 148.4,55.557 cw(c147.707,54.863) DS1302.4@148.688,54.863 ; 2003.8@150.115,90.42 152.659,92.964 ; 2003.8@150.115,90.827 ccw(c150.115,91.808) 150.809,91.114 ; 2003.8@150.115,91.081 ccw(c150.115,92.675) 151.242,91.548 ; 2003.8@150.613,90.583 cw(c151.423,90.583) 150.85,91.156 ; 8050.1@153.12,92.737 ccw(c152.659,92.382) 152.659,92.964 ; 8050.1@153.12,93.191 cw(c152.659,93.546) 152.659,92.964 ; 8050.1@153.152,93.728 ccw(c152.516,94.365) 153.416,94.365 ccw(c154.316,94.365) 8050.1@153.68,93.728 ; DA0832.10@154.843,100.066 cw(c153.993,99.216) 155.195,99.216 cw(c156.397,99.216) DA0832.10@155.547,100.066 ; DA0832.10@155.547,100.228 cw(c156.397,99.378) 156.397,100.58 cw(c156.397,101.782) DA0832.10@155.547,100.932 ; 红外接头.2@156.888,35.576 ccw(c156.489,36.195) 157.226,36.195 ; 红外接头.2@157.564,35.576 cw(c157.963,36.195) 157.226,36.195 ; 158.662,100.743 ccw(c158.411,100.994) Ref.2@158.692,101.212 ; 158.666,100.746 cw(c159.195,100.217) Ref.2@159.195,100.965 ; Ref.2@159.258,101.6 159.258,101.338 158.5,100.58 DA0832.10@155.195,100.58 155.195,96.267 153.416,94.488 8050.1@153.416,92.964 152.659,92.964 ; *.2@165.354,45.212 cw(c165.354,43.986) 166.221,44.853 cw(c167.088,45.72) *.2@165.862,45.72 ; *.2@165.354,45.72 167.005,44.069 167.005,37.084 166.243,36.322 157.353,36.322 157.226,36.195 ; 140.462,30.861 S04.2@140.462,29.972 141.732,29.972 142.748,30.988 148.336,30.988 150.241,29.083 156.718,29.083 156.718,34.163 157.226,34.671 157.226,36.195
  Bottom Layer w0.254: powerkey.5@57.684,83.876 ccw(c56.642,82.9) 56.642,84.328 ; powerkey.5@57.684,84.78 cw(c56.642,85.756) 56.642,84.328 ; powerkey.5@57.869,84.05 ccw(c57.228,83.449) 57.228,84.328 ccw(c57.228,85.207) powerkey.5@57.869,84.606 ; powerkey.5@58.166,84.328 56.642,84.328 ; 59.707,78.467 ccw(c60.834,79.594) MAX232.15@60.834,78 ; 60.099,78.075 cw(c59.526,77.502) MAX232.15@60.336,77.502 ; 60.14,78.033 ccw(c60.834,78.727) MAX232.15@60.834,77.746 ; MAX232.15@60.834,77.339 59.179,78.994 56.769,78.994 55.88,79.883 55.88,83.566 56.642,84.328 ; 1602.1@127.829,115.249 ccw(c126.766,116.312) 128.27,116.312 ccw(c129.774,116.312) 1602.1@128.711,115.249 ; 12864.1@127.829,117.923 cw(c126.766,116.86) 128.27,116.86 cw(c129.774,116.86) 12864.1@128.711,117.923 ; 1602.1@128.009,115.069 ccw(c127.379,115.699) 128.27,115.699 ccw(c129.161,115.699) 1602.1@128.531,115.069 ; 12864.1@128.009,118.103 cw(c127.379,117.473) 128.27,117.473 cw(c129.161,117.473) 12864.1@128.531,118.103 ; 1602.1@128.27,114.808 12864.1@128.27,118.364 ; DA0832.3@137.415,99.92 cw(c137.415,98.625) 138.33,99.541 ; DA0832.3@137.415,100.174 cw(c137.415,99.492) 137.897,99.974 ; DA0832.3@137.415,100.58 137.415,100.456 138.557,99.314 154.432,99.314 155.195,100.077 DA0832.10@155.195,100.58 ; DA0832.3@137.913,100.418 ccw(c139.023,100.418) 138.238,99.633 ; v1@142.367,34.036 ccw(c142.367,34.956) 143.017,34.305 ; v1@142.367,34.544 ccw(c142.367,36.69) 143.885,35.173 ; v1@142.367,34.798 ccw(c142.367,37.557) 144.318,35.606 ; 143.451,34.739 cw(c142.367,35.823) v1(142.367,34.29) 143.002,34.29 145.923,37.211 145.923,40.513 146.304,40.894 148.59,40.894 148.971,40.513 148.971,36.703 156.718,36.703 157.226,36.195 ; 24LC02.7@146.046,59.943 146.046,60.067 147.574,61.595 147.574,63.881 145.288,66.167 145.288,77.216 146.177,78.105 148.082,78.105 148.082,84.582 150.115,86.615 2003.8@150.115,90.42 ; 24LC02.7@146.224,60.426 ccw(c146.224,60.862) 146.532,60.553 ; 24LC02.7@146.453,59.943 cw(c147.733,59.943) 146.828,60.849 ; 24LC02.7@146.707,59.943 cw(c148.601,59.943) 147.261,61.282 ; 2003.8@149.763,89.906 cw(c148.913,89.056) 150.115,89.056 cw(c151.317,89.056) 2003.8@150.467,89.906 ; 154.602,99.484 ccw(c154.136,99.951) DA0832.10@154.739,100.217 ; 154.865,99.747 ccw(c154.5,100.111) DA0832.10@154.972,100.319 ; 154.927,99.809 cw(c155.195,99.54) DA0832.10@155.195,99.92 ; 红外接头.2@156.888,35.576 ccw(c156.489,36.195) 157.226,36.195 ; 红外接头.2@157.226,35.052 157.226,36.195 ; 红外接头.2@157.564,35.576 cw(c157.963,36.195) 157.226,36.195
IOUT1: DA0832.12 DAC0832.1 | length 21.3
  Top Layer w0.254: DA0832.12@152.303,107.686 cw(c151.453,106.836) 152.655,106.836 cw(c153.857,106.836) DA0832.12@153.007,107.686 ; DA0832.12@152.655,108.2 152.655,106.171 153.543,105.283 163.957,105.283 DAC0832.1@165.354,106.68 ; DAC0832.1@164.731,106.68 cw(c163.227,106.68) 164.29,105.616 cw(c165.354,104.553) DAC0832.1@165.354,106.057 ; DAC0832.1@164.985,106.68 cw(c164.094,106.68) 164.724,106.05 cw(c165.354,105.42) DAC0832.1@165.354,106.311
IOUT2: DA0832.11 DAC0832.2 | length 16.9
  Bottom Layer w0.254: DA0832.11@155.195,108.2 161.167,108.2 DAC0832.2@165.227,104.14 ; DA0832.11@155.547,107.848 cw(c156.397,106.998) 156.397,108.2 cw(c156.397,109.402) DA0832.11@155.547,108.552 ; 164.074,105.293 ccw(c165.354,106.574) DAC0832.2@165.354,104.763 ; 164.38,104.987 cw(c163.534,104.14) DAC0832.2@164.731,104.14 ; 164.507,104.86 ccw(c165.354,105.706) DAC0832.2@165.354,104.509
LED: D1.1 D2.1 D3.1 D4.1 D5.1 D6.1 D7.1 D8.1 tp3.1 | length 221.7
  Top Layer w0.254: tp3.1@123.698,92.456 124.841,92.456 ; tp3.1@124.222,92.118 cw(c124.841,91.719) 124.841,92.456 ; tp3.1@124.222,92.794 ccw(c124.841,93.193) 124.841,92.456 ; 133.548,88.067 cw(c132.701,87.221) D1.1@133.868,86.953 ; D3.1@133.79,82.237 ccw(c132.706,83.321) 134.239,83.321 ccw(c135.772,83.321) D3.1@134.688,82.237 ; D2.1@133.79,83.879 cw(c132.706,82.795) 134.239,82.795 cw(c135.772,82.795) D2.1@134.688,83.879 ; D2.1@133.79,84.777 ccw(c132.706,85.861) 134.239,85.861 ccw(c135.772,85.861) D2.1@134.688,84.777 ; D1.1@133.79,86.419 cw(c132.706,85.335) 134.239,85.335 cw(c135.772,85.335) D1.1@134.688,86.419 ; 133.872,87.743 cw(c133.229,87.1) D1.1@134.115,86.896 ; D3.1@133.97,82.057 ccw(c133.319,82.708) 134.239,82.708 ccw(c135.159,82.708) D3.1@134.508,82.057 ; D2.1@133.97,84.059 cw(c133.319,83.408) 134.239,83.408 cw(c135.159,83.408) D2.1@134.508,84.059 ; D2.1@133.97,84.597 ccw(c133.319,85.248) 134.239,85.248 ccw(c135.159,85.248) D2.1@134.508,84.597 ; D1.1@133.97,86.599 cw(c133.319,85.948) 134.239,85.948 cw(c135.159,85.948) D1.1@134.508,86.599 ; D7.1@134.239,71.628 D8.1@134.239,69.088 ; D5.1@134.239,76.708 D8.1@134.239,69.088 ; D4.1@134.239,79.248 D8.1@134.239,69.088 ; D3.1@134.239,81.788 D8.1@134.239,69.088 ; 124.841,92.456 129.159,88.138 133.477,88.138 134.239,87.376 D2.1@134.239,84.328 D8.1@134.239,69.088 ; D8.1@133.79,69.537 ccw(c132.706,70.621) 134.239,70.621 ; D8.1@133.79,69.537 ccw(c132.706,70.621) 134.239,70.621 ; D8.1@133.79,69.537 ccw(c132.706,70.621) 134.239,70.621 ; D8.1@133.79,69.537 ccw(c132.706,70.621) 134.239,70.621 ; D8.1@133.79,69.537 ccw(c132.706,70.621) 134.239,70.621 ; D7.1@133.79,71.179 cw(c132.706,70.095) 134.239,70.095 ; D7.1@133.79,71.179 cw(c132.706,70.095) 134.239,70.095 ; D7.1@133.79,71.179 cw(c132.706,70.095) 134.239,70.095 ; D7.1@133.79,71.179 cw(c132.706,70.095) 134.239,70.095 ; D7.1@133.79,71.179 cw(c132.706,70.095) 134.239,70.095 ; D7.1@133.79,72.077 ccw(c132.706,73.161) 134.239,73.161 ; D7.1@133.79,72.077 ccw(c132.706,73.161) 134.239,73.161 ; D7.1@133.79,72.077 ccw(c132.706,73.161) 134.239,73.161 ; D7.1@133.79,72.077 ccw(c132.706,73.161) 134.239,73.161 ; D6.1@133.79,73.719 cw(c132.706,72.635) 134.239,72.635 ; D6.1@133.79,73.719 cw(c132.706,72.635) 134.239,72.635 ; D6.1@133.79,73.719 cw(c132.706,72.635) 134.239,72.635 ; D6.1@133.79,73.719 cw(c132.706,72.635) 134.239,72.635 ; D6.1@133.79,74.617 ccw(c132.706,75.701) 134.239,75.701 ; D6.1@133.79,74.617 ccw(c132.706,75.701) 134.239,75.701 ; D6.1@133.79,74.617 ccw(c132.706,75.701) 134.239,75.701 ; D6.1@133.79,74.617 ccw(c132.706,75.701) 134.239,75.701 ; D5.1@133.79,76.259 cw(c132.706,75.175) 134.239,75.175 ; D5.1@133.79,76.259 cw(c132.706,75.175) 134.239,75.175 ; D5.1@133.79,76.259 cw(c132.706,75.175) 134.239,75.175 ; D5.1@133.79,76.259 cw(c132.706,75.175) 134.239,75.175 ; D5.1@133.79,77.157 ccw(c132.706,78.241) 134.239,78.241 ; D5.1@133.79,77.157 ccw(c132.706,78.241) 134.239,78.241 ; D5.1@133.79,77.157 ccw(c132.706,78.241) 134.239,78.241 ; D4.1@133.79,78.799 cw(c132.706,77.715) 134.239,77.715 ; D4.1@133.79,78.799 cw(c132.706,77.715) 134.239,77.715 ; D4.1@133.79,78.799 cw(c132.706,77.715) 134.239,77.715 ; D8.1@133.97,69.357 ccw(c133.319,70.008) 134.239,70.008 ; D8.1@133.97,69.357 ccw(c133.319,70.008) 134.239,70.008 ; D8.1@133.97,69.357 ccw(c133.319,70.008) 134.239,70.008 ; D8.1@133.97,69.357 ccw(c133.319,70.008) 134.239,70.008 ; D8.1@133.97,69.357 ccw(c133.319,70.008) 134.239,70.008 ; D7.1@133.97,71.359 cw(c133.319,70.708) 134.239,70.708 ; D7.1@133.97,71.359 cw(c133.319,70.708) 134.239,70.708 ; D7.1@133.97,71.359 cw(c133.319,70.708) 134.239,70.708 ; D7.1@133.97,71.359 cw(c133.319,70.708) 134.239,70.708 ; D7.1@133.97,71.359 cw(c133.319,70.708) 134.239,70.708 ; D7.1@133.97,71.897 ccw(c133.319,72.548) 134.239,72.548 ; D7.1@133.97,71.897 ccw(c133.319,72.548) 134.239,72.548 ; D7.1@133.97,71.897 ccw(c133.319,72.548) 134.239,72.548 ; D7.1@133.97,71.897 ccw(c133.319,72.548) 134.239,72.548 ; D6.1@133.97,73.899 cw(c133.319,73.248) 134.239,73.248 ; D6.1@133.97,73.899 cw(c133.319,73.248) 134.239,73.248 ; D6.1@133.97,73.899 cw(c133.319,73.248) 134.239,73.248 ; D6.1@133.97,73.899 cw(c133.319,73.248) 134.239,73.248 ; D6.1@133.97,74.437 ccw(c133.319,75.088) 134.239,75.088 ; D6.1@133.97,74.437 ccw(c133.319,75.088) 134.239,75.088 ; D6.1@133.97,74.437 ccw(c133.319,75.088) 134.239,75.088 ; D6.1@133.97,74.437 ccw(c133.319,75.088) 134.239,75.088 ; D5.1@133.97,76.439 cw(c133.319,75.788) 134.239,75.788 ; D5.1@133.97,76.439 cw(c133.319,75.788) 134.239,75.788 ; D5.1@133.97,76.439 cw(c133.319,75.788) 134.239,75.788 ; D5.1@133.97,76.439 cw(c133.319,75.788) 134.239,75.788 ; D5.1@133.97,76.977 ccw(c133.319,77.628) 134.239,77.628 ; D5.1@133.97,76.977 ccw(c133.319,77.628) 134.239,77.628 ; D5.1@133.97,76.977 ccw(c133.319,77.628) 134.239,77.628 ; D4.1@133.97,78.979 cw(c133.319,78.328) 134.239,78.328 ; D4.1@133.97,78.979 cw(c133.319,78.328) 134.239,78.328 ; D4.1@133.97,78.979 cw(c133.319,78.328) 134.239,78.328 ; 134.239,70.008 ccw(c135.159,70.008) D8.1@134.508,69.357 ; 134.239,70.008 ccw(c135.159,70.008) D8.1@134.508,69.357 ; 134.239,70.008 ccw(c135.159,70.008) D8.1@134.508,69.357 ; 134.239,70.008 ccw(c135.159,70.008) D8.1@134.508,69.357 ; 134.239,70.008 ccw(c135.159,70.008) D8.1@134.508,69.357 ; 134.239,70.095 cw(c135.772,70.095) D7.1@134.688,71.179 ; 134.239,70.095 cw(c135.772,70.095) D7.1@134.688,71.179 ; 134.239,70.095 cw(c135.772,70.095) D7.1@134.688,71.179 ; 134.239,70.095 cw(c135.772,70.095) D7.1@134.688,71.179 ; 134.239,70.095 cw(c135.772,70.095) D7.1@134.688,71.179 ; 134.239,70.621 ccw(c135.772,70.621) D8.1@134.688,69.537 ; 134.239,70.621 ccw(c135.772,70.621) D8.1@134.688,69.537 ; 134.239,70.621 ccw(c135.772,70.621) D8.1@134.688,69.537 ; 134.239,70.621 ccw(c135.772,70.621) D8.1@134.688,69.537 ; 134.239,70.621 ccw(c135.772,70.621) D8.1@134.688,69.537 ; 134.239,70.708 cw(c135.159,70.708) D7.1@134.508,71.359 ; 134.239,70.708 cw(c135.159,70.708) D7.1@134.508,71.359 ; 134.239,70.708 cw(c135.159,70.708) D7.1@134.508,71.359 ; 134.239,70.708 cw(c135.159,70.708) D7.1@134.508,71.359 ; 134.239,70.708 cw(c135.159,70.708) D7.1@134.508,71.359 ; 134.239,72.548 ccw(c135.159,72.548) D7.1@134.508,71.897 ; 134.239,72.548 ccw(c135.159,72.548) D7.1@134.508,71.897 ; 134.239,72.548 ccw(c135.159,72.548) D7.1@134.508,71.897 ; 134.239,72.548 ccw(c135.159,72.548) D7.1@134.508,71.897 ; 134.239,72.635 cw(c135.772,72.635) D6.1@134.688,73.719 ; 134.239,72.635 cw(c135.772,72.635) D6.1@134.688,73.719 ; 134.239,72.635 cw(c135.772,72.635) D6.1@134.688,73.719 ; 134.239,72.635 cw(c135.772,72.635) D6.1@134.688,73.719 ; 134.239,73.161 ccw(c135.772,73.161) D7.1@134.688,72.077 ; 134.239,73.161 ccw(c135.772,73.161) D7.1@134.688,72.077 ; 134.239,73.161 ccw(c135.772,73.161) D7.1@134.688,72.077 ; 134.239,73.161 ccw(c135.772,73.161) D7.1@134.688,72.077 ; 134.239,73.248 cw(c135.159,73.248) D6.1@134.508,73.899 ; 134.239,73.248 cw(c135.159,73.248) D6.1@134.508,73.899 ; 134.239,73.248 cw(c135.159,73.248) D6.1@134.508,73.899 ; 134.239,73.248 cw(c135.159,73.248) D6.1@134.508,73.899 ; 134.239,75.088 ccw(c135.159,75.088) D6.1@134.508,74.437 ; 134.239,75.088 ccw(c135.159,75.088) D6.1@134.508,74.437 ; 134.239,75.088 ccw(c135.159,75.088) D6.1@134.508,74.437 ; 134.239,75.088 ccw(c135.159,75.088) D6.1@134.508,74.437 ; 134.239,75.175 cw(c135.772,75.175) D5.1@134.688,76.259 ; 134.239,75.175 cw(c135.772,75.175) D5.1@134.688,76.259 ; 134.239,75.175 cw(c135.772,75.175) D5.1@134.688,76.259 ; 134.239,75.175 cw(c135.772,75.175) D5.1@134.688,76.259 ; 134.239,75.701 ccw(c135.772,75.701) D6.1@134.688,74.617 ; 134.239,75.701 ccw(c135.772,75.701) D6.1@134.688,74.617 ; 134.239,75.701 ccw(c135.772,75.701) D6.1@134.688,74.617 ; 134.239,75.701 ccw(c135.772,75.701) D6.1@134.688,74.617 ; 134.239,75.788 cw(c135.159,75.788) D5.1@134.508,76.439 ; 134.239,75.788 cw(c135.159,75.788) D5.1@134.508,76.439 ; 134.239,75.788 cw(c135.159,75.788) D5.1@134.508,76.439 ; 134.239,75.788 cw(c135.159,75.788) D5.1@134.508,76.439 ; 134.239,77.628 ccw(c135.159,77.628) D5.1@134.508,76.977 ; 134.239,77.628 ccw(c135.159,77.628) D5.1@134.508,76.977 ; 134.239,77.628 ccw(c135.159,77.628) D5.1@134.508,76.977 ; 134.239,77.715 cw(c135.772,77.715) D4.1@134.688,78.799 ; 134.239,77.715 cw(c135.772,77.715) D4.1@134.688,78.799 ; 134.239,77.715 cw(c135.772,77.715) D4.1@134.688,78.799 ; 134.239,78.241 ccw(c135.772,78.241) D5.1@134.688,77.157 ; 134.239,78.241 ccw(c135.772,78.241) D5.1@134.688,77.157 ; 134.239,78.241 ccw(c135.772,78.241) D5.1@134.688,77.157 ; 134.239,78.328 cw(c135.159,78.328) D4.1@134.508,78.979 ; 134.239,78.328 cw(c135.159,78.328) D4.1@134.508,78.979 ; 134.239,78.328 cw(c135.159,78.328) D4.1@134.508,78.979 ; 134.239,80.168 ccw(c135.159,80.168) 134.508,79.517 cw(c135.159,80.168) 134.239,80.168 ; 134.239,80.168 cw(c133.319,80.168) 133.97,79.517 ccw(c133.319,80.168) 134.239,80.168 ; 134.239,80.255 ccw(c132.706,80.255) 133.79,81.339 cw(c132.706,80.255) 134.239,80.255 ; 134.239,80.255 cw(c135.772,80.255) 134.688,81.339 ccw(c135.772,80.255) 134.239,80.255 ; 134.239,80.781 ccw(c135.772,80.781) 134.688,79.697 cw(c135.772,80.781) 134.239,80.781 ; 134.239,80.781 cw(c132.706,80.781) 133.79,79.697 ccw(c132.706,80.781) 134.239,80.781 ; 134.239,80.868 ccw(c133.319,80.868) 133.97,81.519 cw(c133.319,80.868) 134.239,80.868 ; 134.239,80.868 cw(c135.159,80.868) 134.508,81.519 ccw(c135.159,80.868) 134.239,80.868